# Altium PCB Glove_Column.PcbDoc
Units mm, origin at the board's own origin, x right, y up, seen from the top; angles counter-clockwise.
Board outline 36.4 x 37.4 mm, 2 copper layers (Top Layer, Bottom Layer); 18 components, 8 nets, 144 pads, 18 vias.
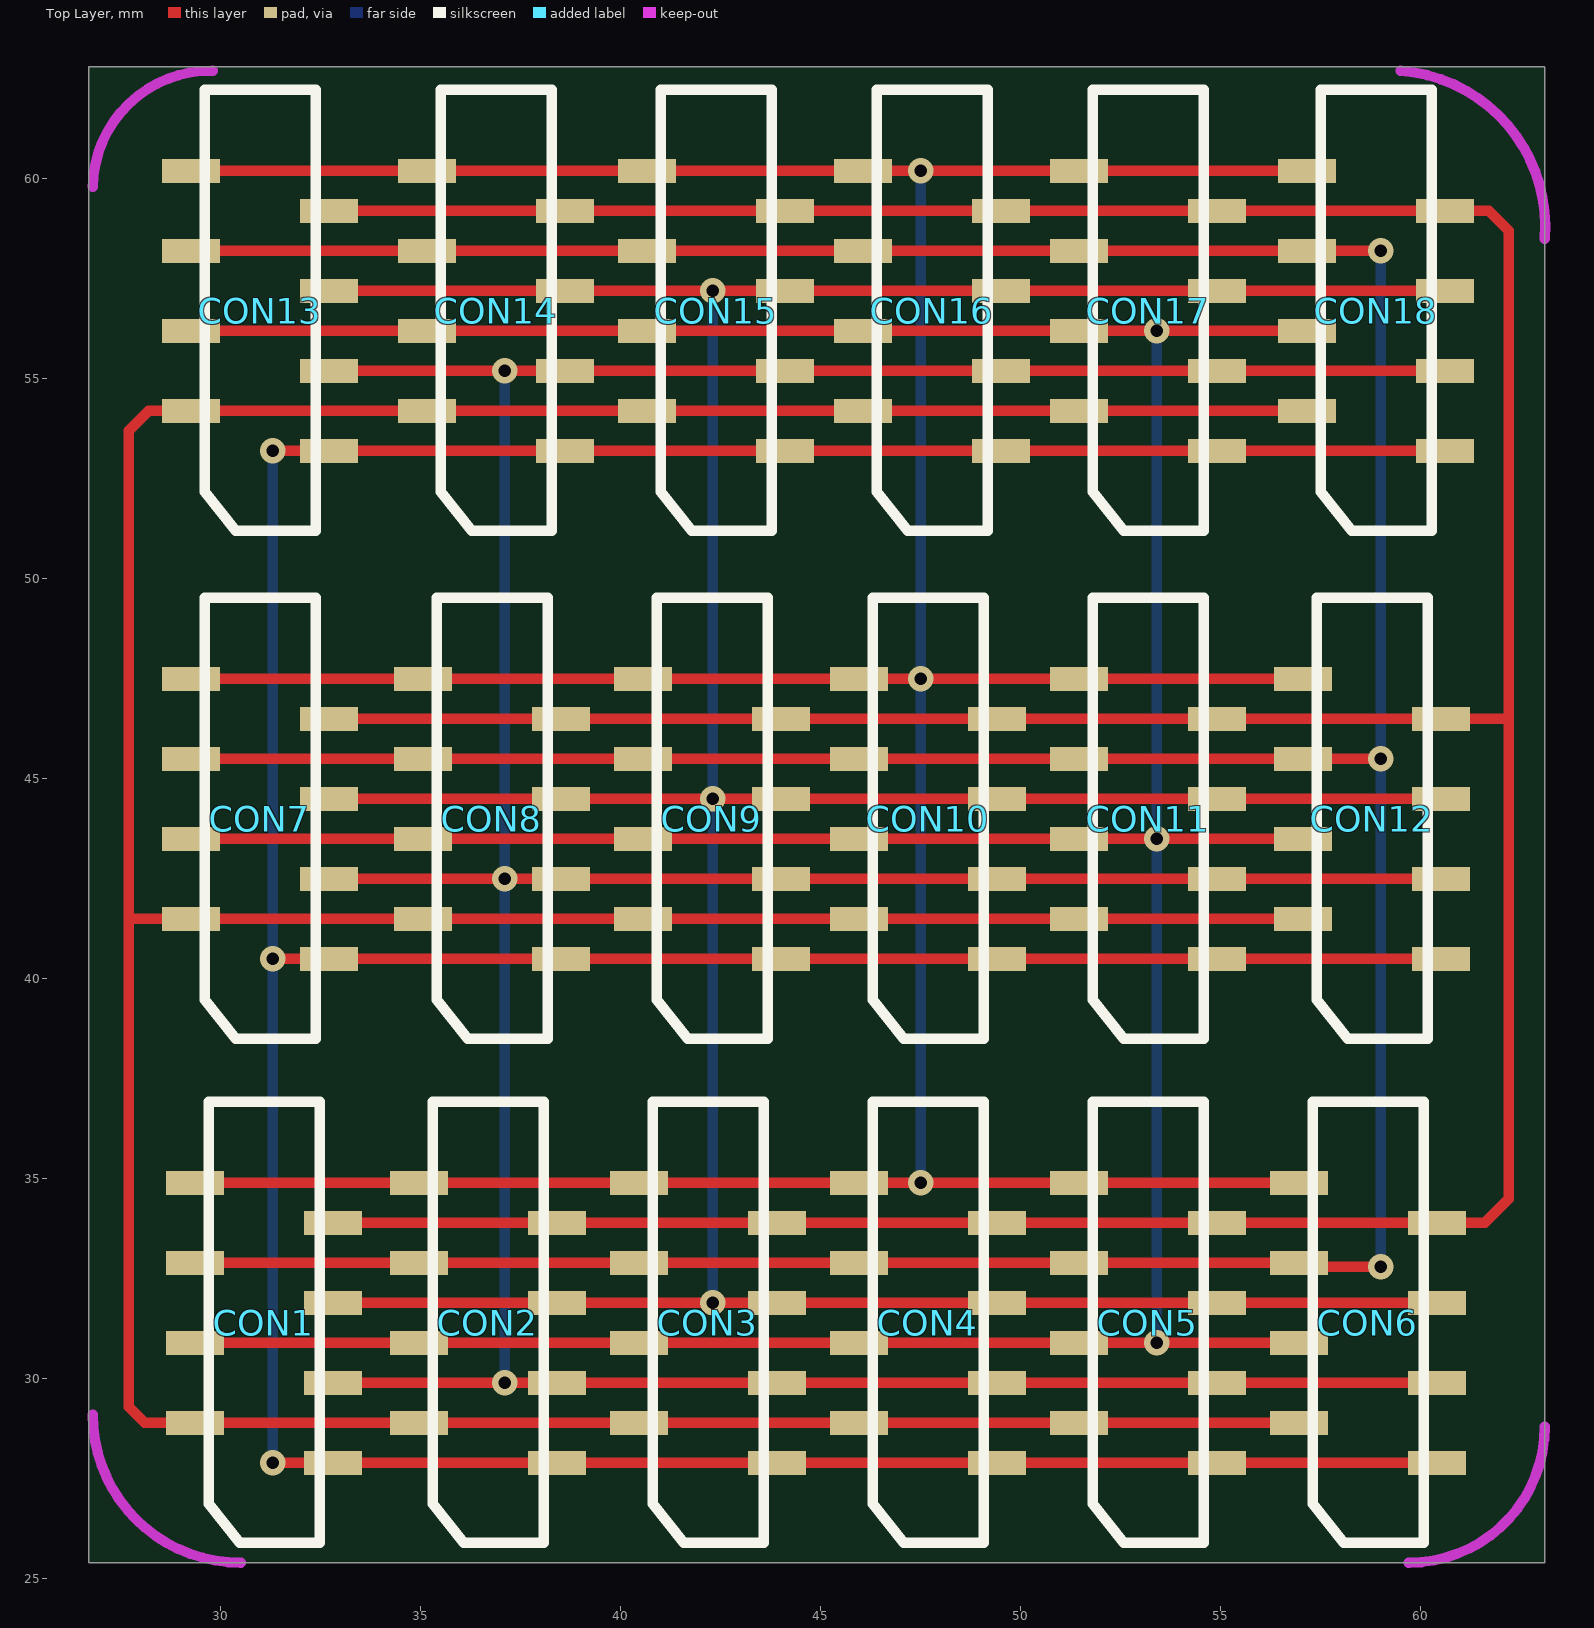
[diagram p0: Top Layer view]
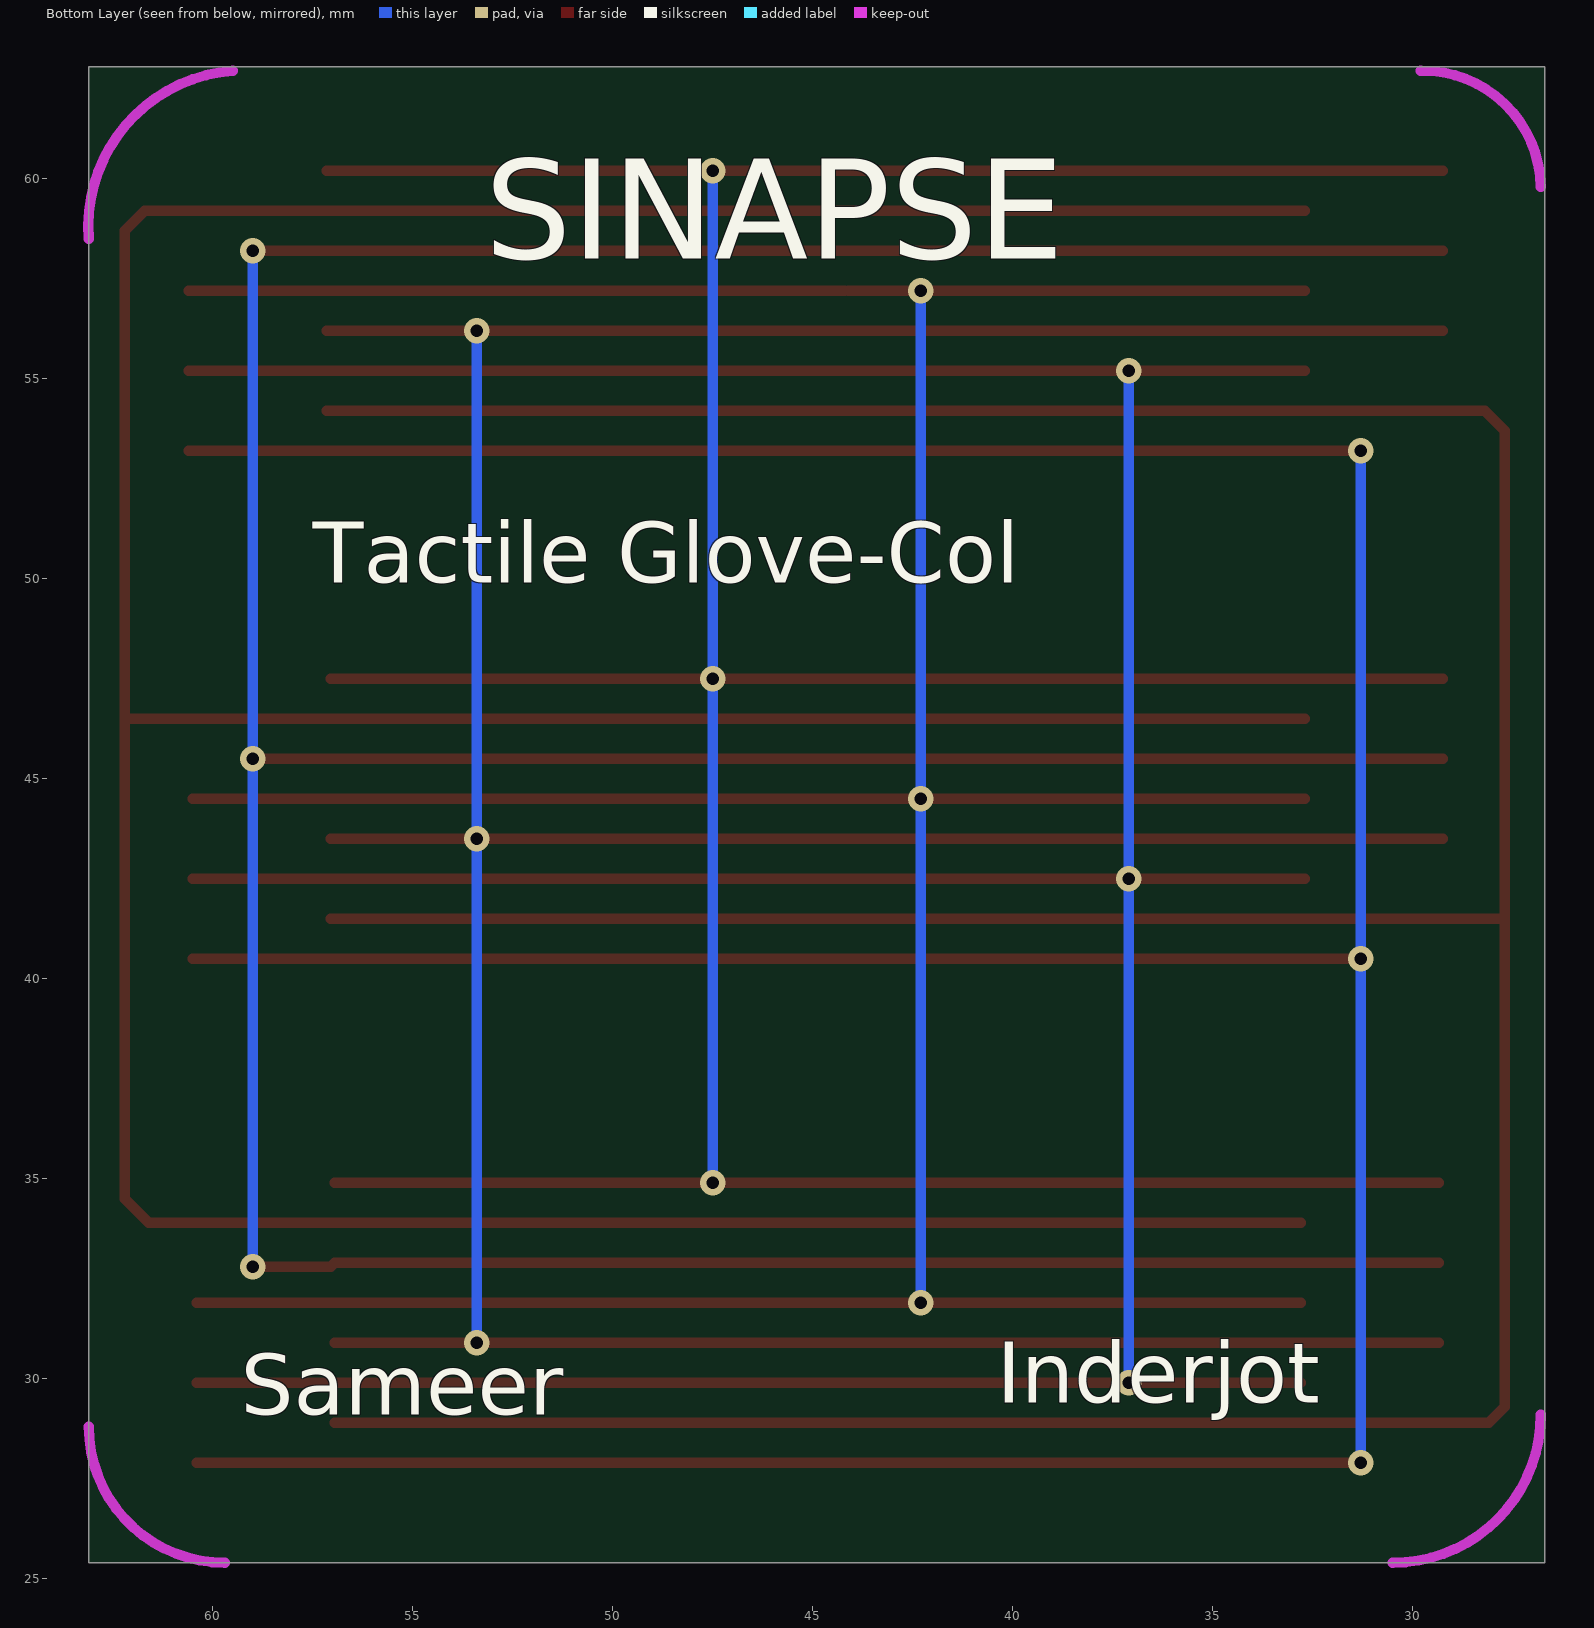
[diagram p1: Bottom Layer view, seen from below]

## Layer stack, top to bottom
Top Solder: solder mask 0.0102, Solder Resist, Dk 3.5
Top Layer: signal copper 0.0356
Dielectric 1: dielectric 0.32, FR-4, Dk 4.8
Bottom Layer: signal copper 0.0356
Bottom Solder: solder mask 0.0102, Solder Resist, Dk 3.5

## Board outline
26.7,25.4 63.1,25.4 63.1,62.8 26.7,62.8

## Design rules (kind name [scope] priority, off if disabled: settings)
Clearance [All] p1: gap=0.254
PolygonConnect [All] p1: connectstyle=Relief reliefconductorwidth=0.254 reliefentries=4 polygonreliefangle="90 Angle" airgapwidth=0.254
RoutingVias [All] p1: holewidth=0.711 width=1.27 viastyle="Through Hole" minholewidth=0.711 minwidth=1.27 maxholewidth=0.711 maxwidth=1.27
SolderMaskExpansion [All] p1: expansion=0.102
UnpouredPolygon [All] p1: allowunpoured=FALSE
Width [All] p1: maxlimit=0.254 minlimit=0.254 preferedwidth=0.254
29 further rules are at their usual default settings.

## Components (designator, comment, footprint, x,y, rotation, side; value= is the part's Value field where it differs from the comment)
CON1 "FFC_8POS" FFC_SMD_8_1 32.8,27.9 r90 top
CON2 "FFC_8POS" FFC_SMD_8_1 38.4,27.9 r90 top
CON3 "FFC_8POS" FFC_SMD_8_1 43.9,27.9 r90 top
CON4 "FFC_8POS" FFC_SMD_8_1 49.4,27.9 r90 top
CON5 "FFC_8POS" FFC_SMD_8_1 54.9,27.9 r90 top
CON6 "FFC_8POS" FFC_SMD_8_1 60.4,27.9 r90 top
CON7 "FFC_8POS" FFC_SMD_8_1 32.7,40.5 r90 top
CON8 "FFC_8POS" FFC_SMD_8_1 38.5,40.5 r90 top
CON9 "FFC_8POS" FFC_SMD_8_1 44,40.5 r90 top
CON10 "FFC_8POS" FFC_SMD_8_1 49.4,40.5 r90 top
CON11 "FFC_8POS" FFC_SMD_8_1 54.9,40.5 r90 top
CON12 "FFC_8POS" FFC_SMD_8_1 60.5,40.5 r90 top
CON13 "FFC_8POS" FFC_SMD_8_1 32.7,53.2 r90 top
CON14 "FFC_8POS" FFC_SMD_8_1 38.6,53.2 r90 top
CON15 "FFC_8POS" FFC_SMD_8_1 44.1,53.2 r90 top
CON16 "FFC_8POS" FFC_SMD_8_1 49.5,53.2 r90 top
CON17 "FFC_8POS" FFC_SMD_8_1 54.9,53.2 r90 top
CON18 "FFC_8POS" FFC_SMD_8_1 60.6,53.2 r90 top

## Footprints (in the part's own frame and the unit in brackets; to place one, negate y for a bottom-side part, rotate by r counter-clockwise, add the part's x,y. Pads: shape width x height; smd on the part's side, far side on the other; paste and mask are expansions set on the pad)
FFC_SMD_8_1 [mm]
  rect 0.6x1.45 smd: 1(0,0) 2(1,3.45) 3(2,0) 4(3,3.45) 5(4,0) 6(5,3.45) 7(6,0) 8(7,3.45)
  silkscreen extent -2,0.33 9.03,3.1

## Part data
CON1 CON2 CON3 CON4 CON5 CON6 CON7 CON8 CON9 CON10 CON11 CON12 CON13 CON14 CON15 CON16 CON17 CON18: library part FFC_8POPS

## Via types
v1: diameter 0.635, hole 0.305, Top Layer to Bottom Layer, 18 vias

## Nets (pads, with @x,y where several pads share a name; then routed paths per layer and width w, separated by ;. In a path a pad name is that pad's centre, name@x,y a point inside that pad or via, vN(x,y) a via of type N, cw(c..) or ccw(c..) an arc to the next point about the centre after c; other vN are vias at no path point)
C1: CON1.1 CON2.1 CON3.1 CON4.1 CON5.1 CON6.1 CON7.1 CON8.1 CON9.1 CON10.1 CON11.1 CON12.1 CON13.1 CON14.1 CON15.1 CON16.1 CON17.1 CON18.1 | length 113.9
  Top Layer w0.254: v1@31.2,40.5 CON7.1 CON8.1 CON9.1 CON10.1@49.6,40.5 ; v1@31.2,53.2 CON13.1 CON14.1 44.2,53.2 CON16.1@50,53.2 ; v1(31.3,27.9) CON1.1 CON2.1 CON3.1 CON4.1 CON5.1 CON6.1 ; CON10.1 CON11.1 CON12.1 ; CON16.1 CON17.1@55,53.2 ; CON17.1 CON18.1
  Bottom Layer w0.254: v1(31.3,27.9) 31.3,42.3 v1(31.3,53.2)
  other v1: 31.3,40.5
C2: CON1.2 CON2.2 CON3.2 CON4.2 CON5.2 CON6.2 CON7.2 CON8.2 CON9.2 CON10.2 CON11.2 CON12.2 CON13.2 CON14.2 CON15.2 CON16.2 CON17.2 CON18.2 | length 129.8
  Top Layer w0.254: 27.7,41.5 CON7.2 CON8.2 CON9.2 CON11.2 CON12.2 ; CON15.2@40.75,54.2 CON14.2 ; CON16.2@46.55,54.2 CON14.2 ; CON6.2 CON5.2 CON4.2 CON3.2 CON2.2 CON1.2 28.1,28.9 27.7,29.3 27.7,53.7 28.2,54.2 CON13.2 CON14.2 ; CON18.2 CON14.2
C3: CON1.3 CON2.3 CON3.3 CON4.3 CON5.3 CON6.3 CON7.3 CON8.3 CON9.3 CON10.3 CON11.3 CON12.3 CON13.3 CON14.3 CON15.3 CON16.3 CON17.3 CON18.3 | length 109.4
  Top Layer w0.254: CON7.3 37,42.5 CON8.3 CON9.3 CON10.3@49.6,42.5 ; CON13.3 CON14.3 44.2,55.2 CON16.3@50,55.2 ; CON1.3 v1(37.1,29.9) CON2.3 CON3.3 CON4.3 CON5.3 CON6.3 ; CON10.3 CON11.3 CON12.3 ; CON16.3 CON17.3@55,55.2 ; CON17.3 CON18.3
  Bottom Layer w0.254: v1(37.1,29.9) 37.1,44.3 v1(37.1,55.2)
  other v1: 37.1,42.5
C4: CON1.4 CON2.4 CON3.4 CON4.4 CON5.4 CON6.4 CON7.4 CON8.4 CON9.4 CON10.4 CON11.4 CON12.4 CON13.4 CON14.4 CON15.4 CON16.4 CON17.4 CON18.4 | length 109.4
  Top Layer w0.254: CON7.4 CON8.4 CON9.4 CON10.4@46.15,43.5 ; CON13.4 CON14.4 40.75,56.2 CON16.4@46.55,56.2 ; CON1.4 CON2.4 CON3.4 CON4.4 CON5.4 52.8,30.9 CON6.4 ; CON10.4 CON11.4 CON12.4 ; CON16.4 CON17.4@51.55,56.2 ; CON17.4 52.7,56.2 CON18.4
  Bottom Layer w0.254: v1(53.4,30.9) 53.4,31.5 53.4,45.3 v1(53.4,56.2)
  other v1: 53.4,43.5
C5: CON1.5 CON2.5 CON3.5 CON4.5 CON5.5 CON6.5 CON7.5 CON8.5 CON9.5 CON10.5 CON11.5 CON12.5 CON13.5 CON14.5 CON15.5 CON16.5 CON17.5 CON18.5 | length 109.4
  Top Layer w0.254: CON7.5 CON8.5 42.2,44.5 CON9.5 CON10.5@49.6,44.5 ; CON13.5 CON14.5 v1@42.2,57.2 ; CON1.5 CON2.5 v1(42.3,31.9) CON3.5 CON4.5 CON5.5 CON6.5 ; v1@42.1,57.2 CON15.5 ; CON15.5@44.2,57.2 CON16.5@50,57.2 ; CON10.5 CON11.5 CON12.5 ; CON16.5 CON17.5@55,57.2 ; CON17.5 CON18.5
  Bottom Layer w0.254: v1(42.3,31.9) 42.3,46.3 v1(42.3,57.2)
  other v1: 42.3,44.5
C6: CON1.6 CON2.6 CON3.6 CON4.6 CON5.6 CON6.6 CON7.6 CON8.6 CON9.6 CON10.6 CON11.6 CON12.6 CON13.6 CON14.6 CON15.6 CON16.6 CON17.6 CON18.6 | length 114.6
  Top Layer w0.254: CON7.6 CON8.6 CON9.6 CON11.6 CON12.6 v1(59,45.5) ; CON13.6 CON14.6 CON18.6 v1(59,58.2) ; CON1.6 CON2.6 CON3.6 CON4.6 CON5.6 CON6.6 57.05,32.8 v1(59,32.8)
  Bottom Layer w0.254: v1(59,32.8) v1(59,58.2)
C7: CON1.7 CON2.7 CON3.7 CON4.7 CON5.7 CON6.7 CON7.7 CON8.7 CON9.7 CON10.7 CON11.7 CON12.7 CON13.7 CON14.7 CON15.7 CON16.7 CON17.7 CON18.7 | length 113.1
  Top Layer w0.254: CON7.7 CON8.7 CON9.7 CON10.7 CON11.7 CON12.7 62.2,46.5 ; CON13.7 CON14.7 CON15.7 CON16.7 CON17.7 CON18.7 61.7,59.2 62.2,58.7 62.2,46.5 ; CON1.7 CON2.7 CON3.7 CON4.7 CON5.7 CON6.7 61.6,33.9 62.2,34.5 62.2,46.5
C8: CON1.8 CON2.8 CON3.8 CON4.8 CON5.8 CON6.8 CON7.8 CON8.8 CON9.8 CON10.8 CON11.8 CON12.8 CON13.8 CON14.8 CON15.8 CON16.8 CON17.8 CON18.8 | length 108.8
  Top Layer w0.254: CON7.8 CON8.8 CON9.8 CON10.8@46.15,47.5 ; CON13.8 CON14.8 CON15.8 CON16.8 CON17.8 CON18.8 ; CON1.8 CON2.8 CON3.8 CON4.8 v1(47.5,34.9) CON5.8 CON6.8 ; CON10.8 CON10.8@46.15,47.5 ; CON12.8 CON11.8 CON10.8@46.15,47.5
  Bottom Layer w0.254: v1(47.5,34.9) v1(47.5,47.5) v1(47.5,60.2)

## Keep-outs
Keep-Out Layer:
  lines w0.254: 26.8,29.1 ccw(c30.5,29.1) 30.5,25.4 ; 26.8,59.8 cw(c29.75,59.75) 29.8,62.7 ; 59.5,62.7 cw(c59.2,58.8) 63.1,58.5 ; 59.7,25.4 ccw(c59.7,28.8) 63.1,28.8

## Silkscreen, mask and mechanical layers (free items; w line width, h text height)
Bottom Overlay:
  text "SINAPSE" at 53.2,58 h2.5
  text "Tactile Glove-Col" at 57.5,49.9 h1.52
  text "Inderjot" at 40.4,29.4 h1.52
  text "Sameer" at 59.3,29.1 h1.52
Mechanical 1:
  lines w0.254: 26.8,29.1 26.8,59.7 ; 29.8,62.7 59.5,62.7 ; 30.5,25.4 59.7,25.4 ; 63.1,28.8 63.1,58.5

## Dimensions
26.7,62.8 to 26.7,25.4 on Top Overlay
26.7,25.4 to 63.1,25.4 on Top Overlay